# EAGLE board SwitchModePowerSupply (EAGLE 9.7.0)
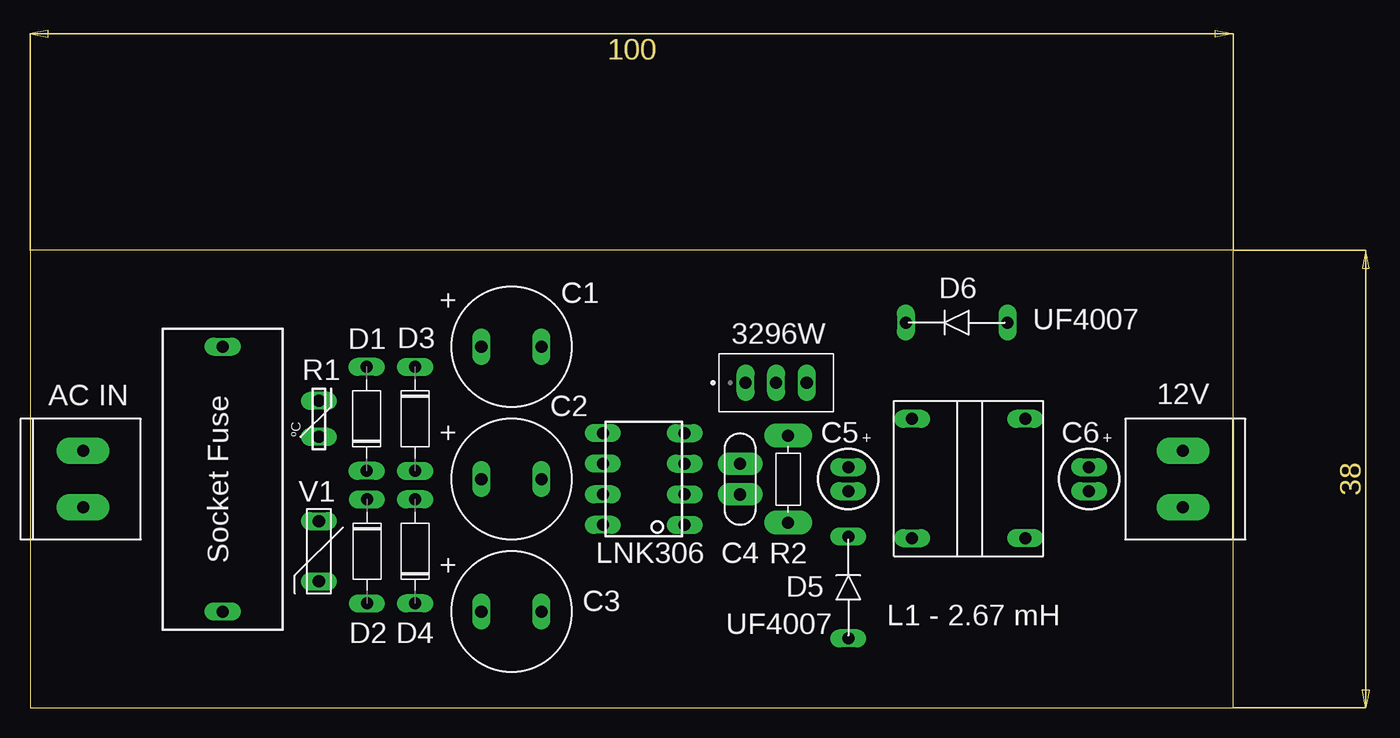
[diagram p0: board, top side]
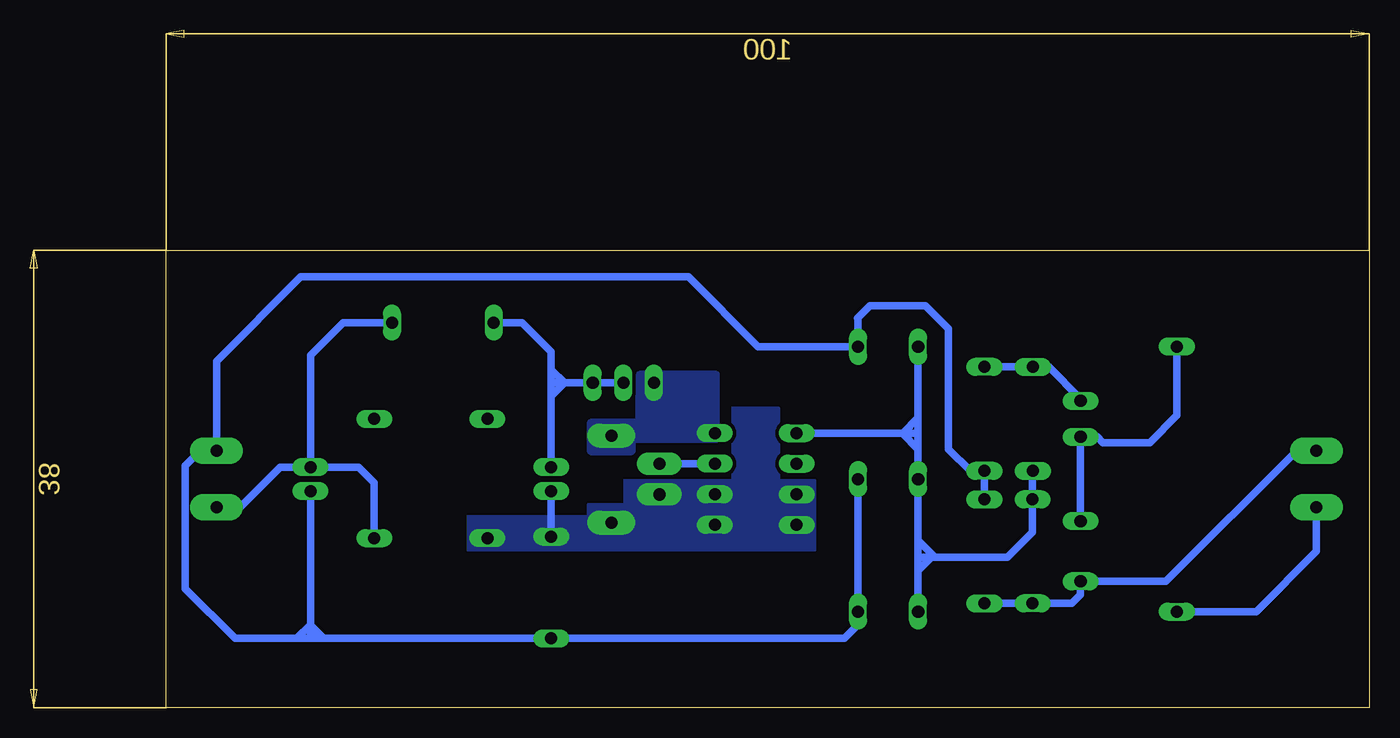
[diagram p1: board, bottom side, seen from below]

Size 100 x 38 mm. Coordinates in mm from the lower left corner, seen from the top.
Outline: 0,0 100,0 100,38 0,38 0,0
Copper layers (1*16): Top / Bottom
Stack-up Default Layer Stack: Top User Defined 0.035mm / Dielectric-1 User Defined 1.5mm / Bottom User Defined 0.035mm
Design rules: minimum copper width 6mil, minimum drill size 0.35mm, copper clearance wire_polygon to wire_polygon 6mil, copper clearance wire_polygon to pad_smd 6mil, copper clearance wire_polygon to via 6mil, copper clearance pad_smd to pad_smd 6mil, copper clearance pad_smd to via 6mil, copper clearance via to via 6mil, copper clearance smd to pad (same net) 6mil, copper clearance smd to via (same net) 6mil, copper clearance smd to smd (same net) 6mil, dimension clearance 40mil, via restrict clearance 0mil, restrict clearance 0mil, drill distance 6mil, keepout clearance 0mil

## Footprints (pad centres in the part's own frame; a part is rotated, then mirrored left to right if it is on the bottom)
TRIM_3296W-1-103RLF = drill 1 long: 1 -2.54,0; 2 0,0; 3 2.54,0
SOCKET_FUS_FOOTPRINT = drill 1 long: P$1 -11,0; P$2 11,0
CAPACITOR_10X13_FOOTPRINT = drill 1 long: P$1 -2.5,0; P$2 2.5,0
CAP-THRU-2.54MM = drill 1.016 pad 1.88 long: 1 -1.27,0; 2 1.27,0
DO-41 = drill 1 long: A 4.325,0; C -4.325,0
RESAD724W46L381D178B = drill 1 pad 2 long: 1 -3.62,0; 2 3.62,0
NTC_FOOTPRINT = drill 1 long: P$1 -1.5,0; P$2 1.5,0
BORNE-2-VIAS-FOOTPRINT = drill 1 pad 2.2 long: P$1 -2.35,0.2; P$2 2.35,0.2
VARISTOR_5D_FOOTPRINT = drill 1 long: P$1 -2.5,0; P$2 2.5,0
INDUTOR_EE_20_FOOTPRINT = drill 1 long: P$1 -4.9,4.7; P$2 5,4.7; P$3 -4.9,-4.7; P$4 5,-4.7
LNK306P_FOOTPRINT = drill 1 long: P$1 -3.8,-3.4; P$2 -1.26,-3.4; P$3 1.28,-3.4; P$4 3.82,-3.4; P$5 3.82,3.4; P$6 1.28,3.4; P$7 -1.26,3.4; P$8 -3.8,3.4
CAPACITOR_FOOTPRINT = drill 1 long: P$1 -1,0; P$2 1,0
UF4007_FOOTPRINT = drill 1 long: P$1 -4.23,0; P$2 4.23,0

## Placement (x,y rotation side)
3296W  3296W-1-103RLF  [TRIM_3296W-1-103RLF]  62,27 0 top
A2  [SOCKET_FUS_FOOTPRINT]  16,19 90 top
C1  CAPACITOR_POL_10X13  [CAPACITOR_10X13_FOOTPRINT]  40,30 0 top
C2  CAPACITOR_POL_10X13  [CAPACITOR_10X13_FOOTPRINT]  40,19 0 top
C3  CAPACITOR_POL_10X13  [CAPACITOR_10X13_FOOTPRINT]  40,8 0 top
C4  [CAP-THRU-2.54MM]  59,19 90 top
D1  1N4007  [DO-41]  27.97,24 90 top
D2  1N4007  [DO-41]  28,13 270 top
D3  1N4007  [DO-41]  32,24 270 top
D4  1N4007  [DO-41]  32,13 90 top
R2  [RESAD724W46L381D178B]  63,19 90 top
S05K300  NTC-20R  [NTC_FOOTPRINT]  24,24 90 top
U$1  BORNE-2-VIAS-COMPONENTE  [BORNE-2-VIAS-FOOTPRINT]  4.2,19 270 top
U$2  VARISTOR_5D  [VARISTOR_5D_FOOTPRINT]  24,13 270 top
U$3  INDUTOR_EE_20  [INDUTOR_EE_20_FOOTPRINT]  78,19 90 top
U$4  BORNE-2-VIAS-COMPONENTE  [BORNE-2-VIAS-FOOTPRINT]  96,19 90 top
U$5  LNK306P  [LNK306P_FOOTPRINT]  51,19 90 top
U$6  CAPACITOR_SANYO_22UF  [CAPACITOR_FOOTPRINT]  88,19 270 top
U$7  UF4007  [UF4007_FOOTPRINT]  68,10 90 top
U$8  UF4007  [UF4007_FOOTPRINT]  77,32 180 top
U$9  CAPACITOR_SANYO_22UF  [CAPACITOR_FOOTPRINT]  68,19 270 top

## Library data of the parts
3296W = POT-MULTIVOLTAS; AVAILABILITY: In Stock; CHECK_PRICES: https://www.snapeda.com/parts/3296W-1-103RLF/Bourns/view-part/?ref=eda; DESCRIPTION: Trimmer, Cermet, Rest 10 Kilohms, PCB, 25 Turns, Pwr-Rtg 0.5W | Bourns 3296W-1-103RLF; MF: Bourns; MP: 3296W-1-103RLF; PACKAGE: NON STANDARD-3 Bourns; PRICE: None; SNAPEDA_LINK: https://www.snapeda.com/parts/3296W-1-103RLF/Bourns/view-part/?ref=snap
A2 = SOCKET_FUSE
C1-C3 = CAPACITOR_10x13
C4 = LED_PTH_ILHA_LONGA
D1-D4 = Diodes; CREATED_BY: PCBLayout.com; DIGIKEY_PART_NUMBER: 1N4007MSCT-ND; MANUFACTURER: Micro Commercial Co; MPN: 1N4007; PACKAGE: DO-41
R2 = RESISTOR_ILHAS_LONGAS; CATEGORY: Resistor; SUB-CATEGORY: Fixed
S05K300 = NTC-20R
U$1 U$4 = borne-2-vias
U$2 = VARISTOR_5D
U$3 = INDUTOR_EE_20
U$5 = LNK306P
U$6 U$9 = CAPACITRO_SANYO_22uF
U$7 U$8 = UF4007

## Nets
FB: 3296W.1 R2.2 U$5.P$4
GND: C1.P$2 C2.P$2 C3.P$2 D3.A D4.A U$4.P$2 U$6.P$2 U$7.P$1
N$1: A2.P$2 S05K300.P$1 U$2.P$1
N$2: U$3.P$3 U$4.P$1 U$6.P$1 U$8.P$1
N$3: A2.P$1 U$1.P$2
N$4: 3296W.2 3296W.3 U$8.P$2 U$9.P$1
N$5: D1.A D3.C S05K300.P$2
N$6: D2.A D4.C U$1.P$1 U$2.P$2
N$8: C4.2 U$5.P$3
S: C4.1 R2.1 U$3.P$1 U$5.P$1 U$5.P$2 U$5.P$7 U$5.P$8 U$7.P$2 U$9.P$2
V+: C1.P$1 C2.P$1 C3.P$1 D1.C D2.C U$5.P$5

## Tracks (layer width: path | path; a pad name or v marks a point on that pad's centre or on a via)
FB
  pour Bottom (isolate 0.305, no thermals): 54,22 54,28 61,28 61,24 65,24 65,21 61,21 61,22
GND
  Bottom 0.61: 86.9,5.77 U$7.P$1 43.63,5.77 42.5,6.9 C3.P$2 C2.P$2 | 86.9,5.77 88.2,5.77 | U$6.P$2 88,6.9 | 88,6.87 88,5.97 88.2,5.77 | 89.13,5.77 94.27,5.77 98.4,9.9 98.4,20.1 97.15,21.35 U$4.P$2 95.8,28.8 88.8,35.8 56.6,35.8 50.8,30 C1.P$2 42.5,32.32 42.54,32.36 41.5,33.4 36.9,33.4 35,31.5 35,21.5 33.17,19.68 D3.A D4.A | 89.13,5.77 88.2,5.77 | 88,6.9 89.13,5.77 | 88,6.9 88,6.87 | 88,6.87 86.9,5.77
N$1
  Bottom 0.61: A2.P$2 16,24.3 18.27,22.04 22.15,22.04 22.61,22.5 S05K300.P$1 U$2.P$1
N$2
  Bottom 0.61: U$8.P$1 85.3,32 88,29.3 U$6.P$1 | U$3.P$3 82.7,18.7 84,20 U$6.P$1 | U$6.P$1 90.5,20 93.85,16.65 U$4.P$1
N$3
  Bottom 0.61: U$1.P$2 4.4,13 9.4,8 A2.P$1
N$4
  Bottom 0.61: 3296W.2 3296W.3 66.9,27 | U$9.P$1 68,25.9 | 68,25.9 68,27 | 68,27 66.9,27 | 68,27 68,28.1 | 68,28.1 68,29.6 70.4,32 U$8.P$2 | 66.9,27 68,28.1 | 66.9,27 68,25.9
N$5
  Bottom 0.61: S05K300.P$2 24,25.69 26.64,28.32 D1.A D3.C
N$6
  Bottom 0.61: U$1.P$1 6.05,21.35 16.9,10.5 U$2.P$2 24,9.4 24.73,8.68 D2.A D4.C
N$8
  Bottom 0.61: U$5.P$3 C4.2
S
  Bottom 0.61: U$7.P$2 U$9.P$2
  pour Bottom (isolate 0.305, no thermals): 49,25 49,19 46,19 46,13 75,13 75,16 65,16 65,17 62,17 62,19 53,19 53,25
V+
  Bottom 0.61: 36.1,12.5 30.1,12.5 28,14.6 D2.C 28,19.64 D1.C | 36.4,12.5 37.46,12.5 | U$5.P$5 38.82,22.82 | 38.82,22.82 37.5,21.5 C2.P$1 | C3.P$1 37.5,11.4 | 37.5,11.4 37.5,13.9 | 37.5,13.9 C2.P$1 | 36.1,12.5 37.5,13.9 | 36.1,12.5 36.4,12.5 | 36.4,12.5 37.5,11.4 | C1.P$1 37.5,24.1 | 37.5,24.1 37.5,22.8 | 37.5,22.8 C2.P$1 | 38.82,22.82 38.78,22.82 | 38.78,22.82 37.5,24.1 | 38.78,22.82 37.52,22.82 37.5,22.8

## Text on the board
SilkscreenTop: D6 | UF4007 | R1 | AC IN | 12V | C5 | C6 | V1 | LNK306 | D5 | L1 - 2.67 mH | UF4007